# Altium PCB Version2.3.PcbDoc
Units mm, origin at the board's own origin, x right, y up, seen from the top; angles counter-clockwise.
Board outline 152.4 x 101.6 mm, 2 copper layers (Top Layer, Bottom Layer); 2 components, 16 nets, 36 pads, 2 vias.
Unrouted connection lines stored in the file: 8.
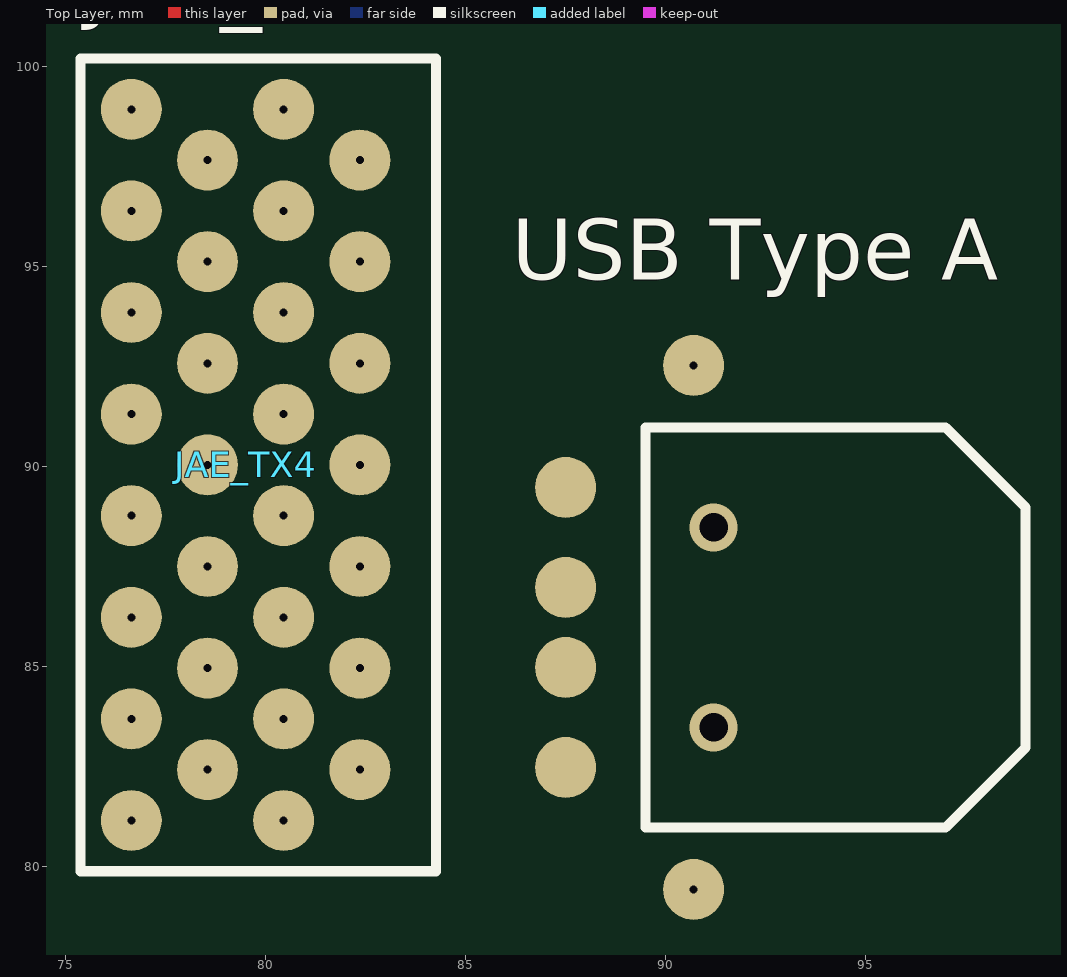
[diagram p0: Top Layer view]
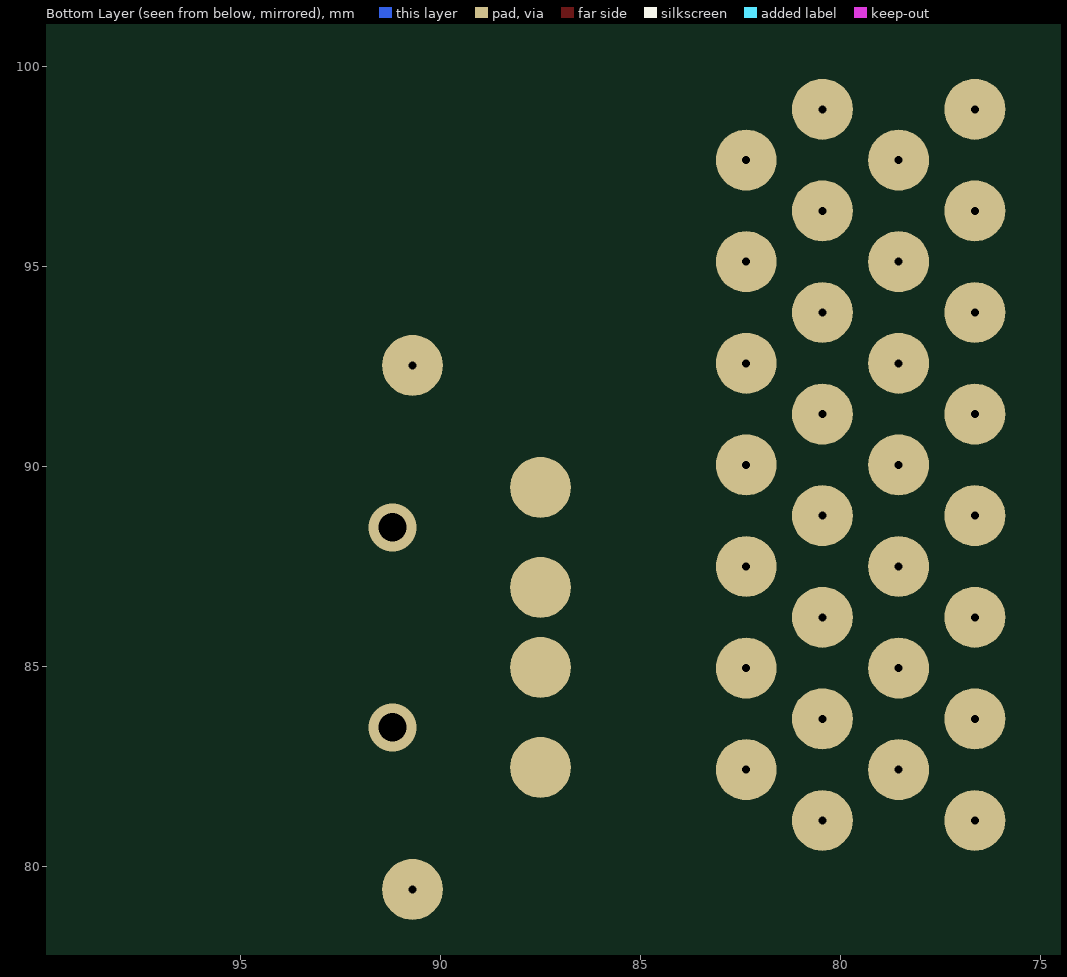
[diagram p1: Bottom Layer view, seen from below]

## Layer stack, top to bottom
Top Solder: solder mask 0.0102, Solder Resist, Dk 3.5
Top Layer: signal copper 0.0356
Dielectric 1: dielectric 0.32, FR-4, Dk 4.8
Bottom Layer: signal copper 0.0356
Bottom Solder: solder mask 0.0102, Solder Resist, Dk 3.5

## Board outline
25.4,25.4 177.8,25.4 177.8,127 25.4,127

## Design rules (kind name [scope] priority, off if disabled: settings)
Clearance [All] p1: gap=0.254
PolygonConnect [All] p1: connectstyle=Relief reliefconductorwidth=0.254 reliefentries=4 polygonreliefangle="90 Angle" airgapwidth=0.254
RoutingVias [All] p1: holewidth=0.711 width=1.27 viastyle="Through Hole" minholewidth=0.711 minwidth=1.27 maxholewidth=0.711 maxwidth=1.27
SolderMaskExpansion [All] p1: expansion=0.102
Width [All] p1: maxlimit=0.254 minlimit=0.254 preferedwidth=0.254
30 further rules are at their usual default settings.

## Components (designator, comment, footprint, x,y, rotation, side; value= is the part's Value field where it differs from the comment)
JAE_TX4 "30 pin" TX_24 79.502,90.043 r0 top
"USB Type A" "Host" "USB 2.0 SMD" 87.503,85.979 r90 top

## Footprints (in the part's own frame and the unit in brackets; to place one, negate y for a bottom-side part, rotate by r counter-clockwise, add the part's x,y. Pads: shape width x height; smd on the part's side, far side on the other; paste and mask are expansions set on the pad)
TX_24 [mil]
  round 60 hole 7.87: 1(-112.5,-350) 2(-37.5,-300) 3(-112.5,-250) 4(-37.5,-200) 5(-112.5,-150) 6(-37.5,-100) 7(-112.5,-50) 8(-37.5,0) 9(-112.5,50) 10(-37.5,100) 11(-112.5,150) 12(-37.5,200) 13(-112.5,250) 14(-37.5,300) 15(-112.5,350) 16(37.5,-350) 17(112.5,-300) 18(37.5,-250) 19(112.5,-200) 20(37.5,-150) 21(112.5,-100) 22(37.5,-50) 23(112.5,0) 24(37.5,50) 25(112.5,100) 26(37.5,150) 27(112.5,200) 28(37.5,250) 29(112.5,300) 30(37.5,350)
  silkscreen extent -162,-400 188,400
"USB 2.0 SMD" [mil] "Type A"
  round 60 all layers, no hole: 1(-137.8,0) 2(-39.37,0) 3(39.37,0) 4(137.8,0)
  round 60 hole 7.87: Sheild_1(-257.87,-125.98) Shield_2(257.87,-125.98)
  silkscreen extent -197,-453 197,-79

## Part data
JAE_TX4: library part JAE_TX4
"USB Type A": library part "USB Type A"

## Via types
v1: diameter 1.2, hole 0.711, Top Layer to Bottom Layer, 2 vias

## Nets (pads, with @x,y where several pads share a name; then routed paths per layer and width w, separated by ;. In a path a pad name is that pad's centre, name@x,y a point inside that pad or via, vN(x,y) a via of type N, cw(c..) or ccw(c..) an arc to the next point about the centre after c; other vN are vias at no path point)
+5V: JAE_TX4.17
BATT: JAE_TX4.15
"BUS ID": JAE_TX4.23
CANH1: JAE_TX4.12
CANL1: JAE_TX4.13
D_N: "USB Type A.2" JAE_TX4.1
D_P: "USB Type A.3" JAE_TX4.2
GND: JAE_TX4.14 JAE_TX4.21 JAE_TX4.27 JAE_TX4.28 JAE_TX4.29
SER2CT: JAE_TX4.25
SER2RT: JAE_TX4.10
SER2RX: JAE_TX4.26
SER2TX: JAE_TX4.11
SER5RX: JAE_TX4.24
SER5TX: JAE_TX4.9
USB_5V: "USB Type A.1" JAE_TX4.19
USB_GND: "USB Type A.4" JAE_TX4.16
pads on no net: "USB Type A.Sheild_1" "USB Type A.Shield_2" JAE_TX4.3 JAE_TX4.4 JAE_TX4.5 JAE_TX4.6 JAE_TX4.7 JAE_TX4.8 JAE_TX4.18 JAE_TX4.20 JAE_TX4.22 JAE_TX4.30
copper on no net:
  other v1: 91.203,83.479 91.203,88.479